# Altium PCB MiniPCIe.PcbDoc
Units mm, origin at the board's own origin, x right, y up, seen from the top; angles counter-clockwise.
Board outline 30 x 26.8 mm, 2 copper layers (Top Layer, Bottom Layer); 1 components, 0 nets, 54 pads, 0 vias.
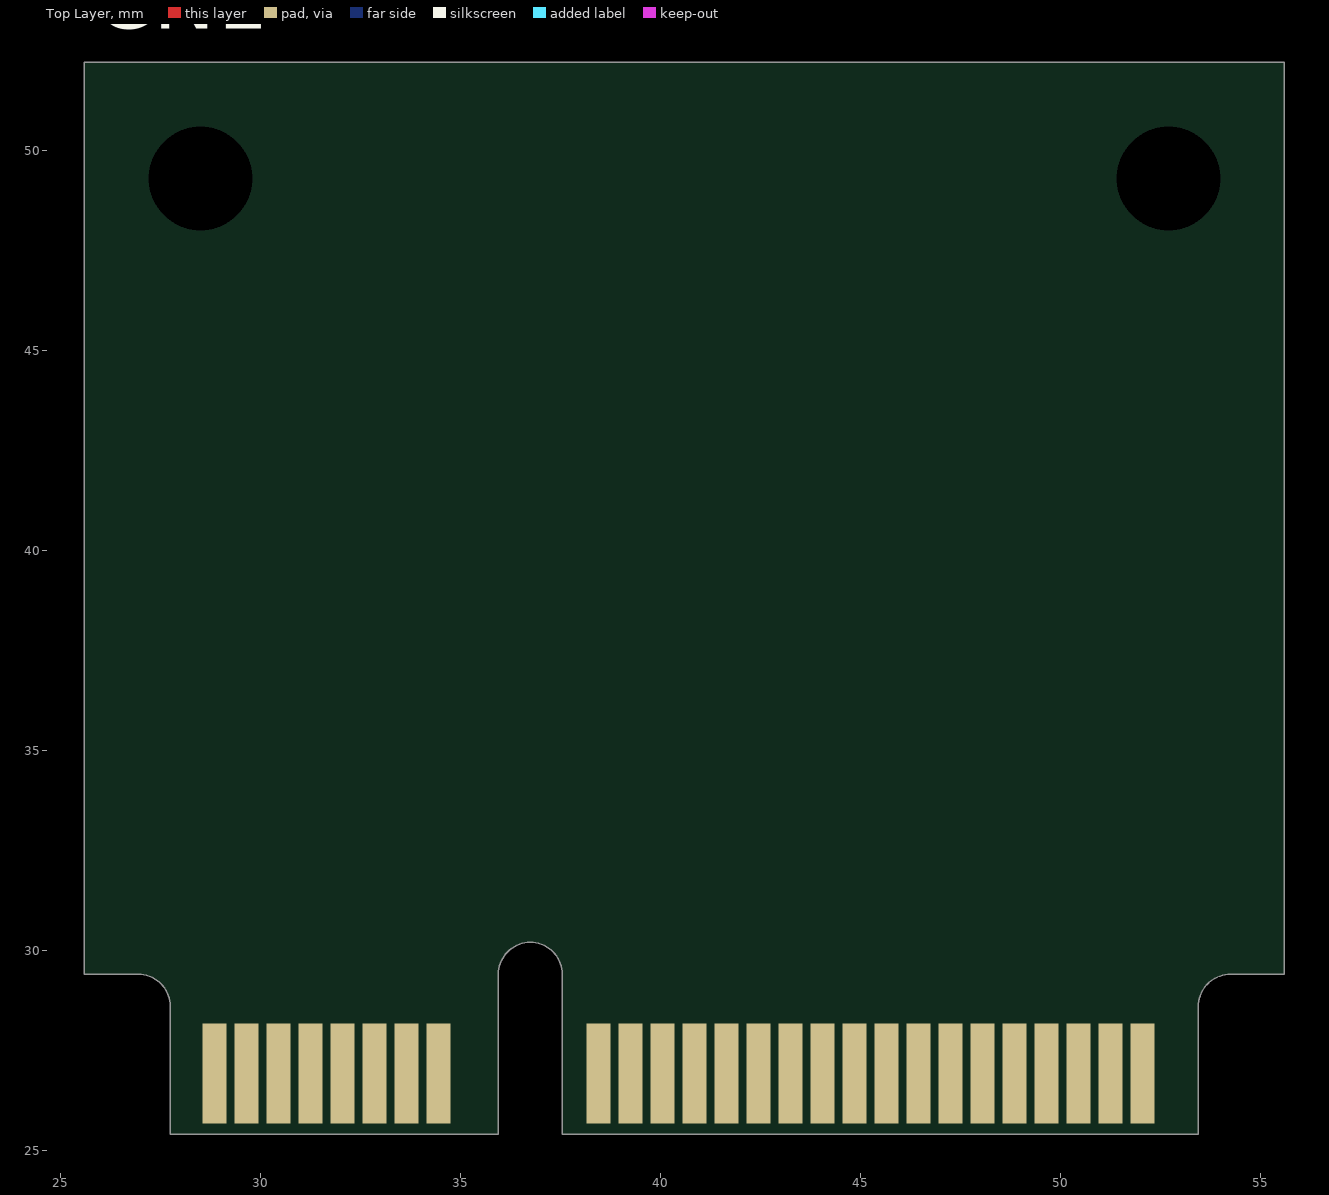
[diagram p0: Top Layer view]
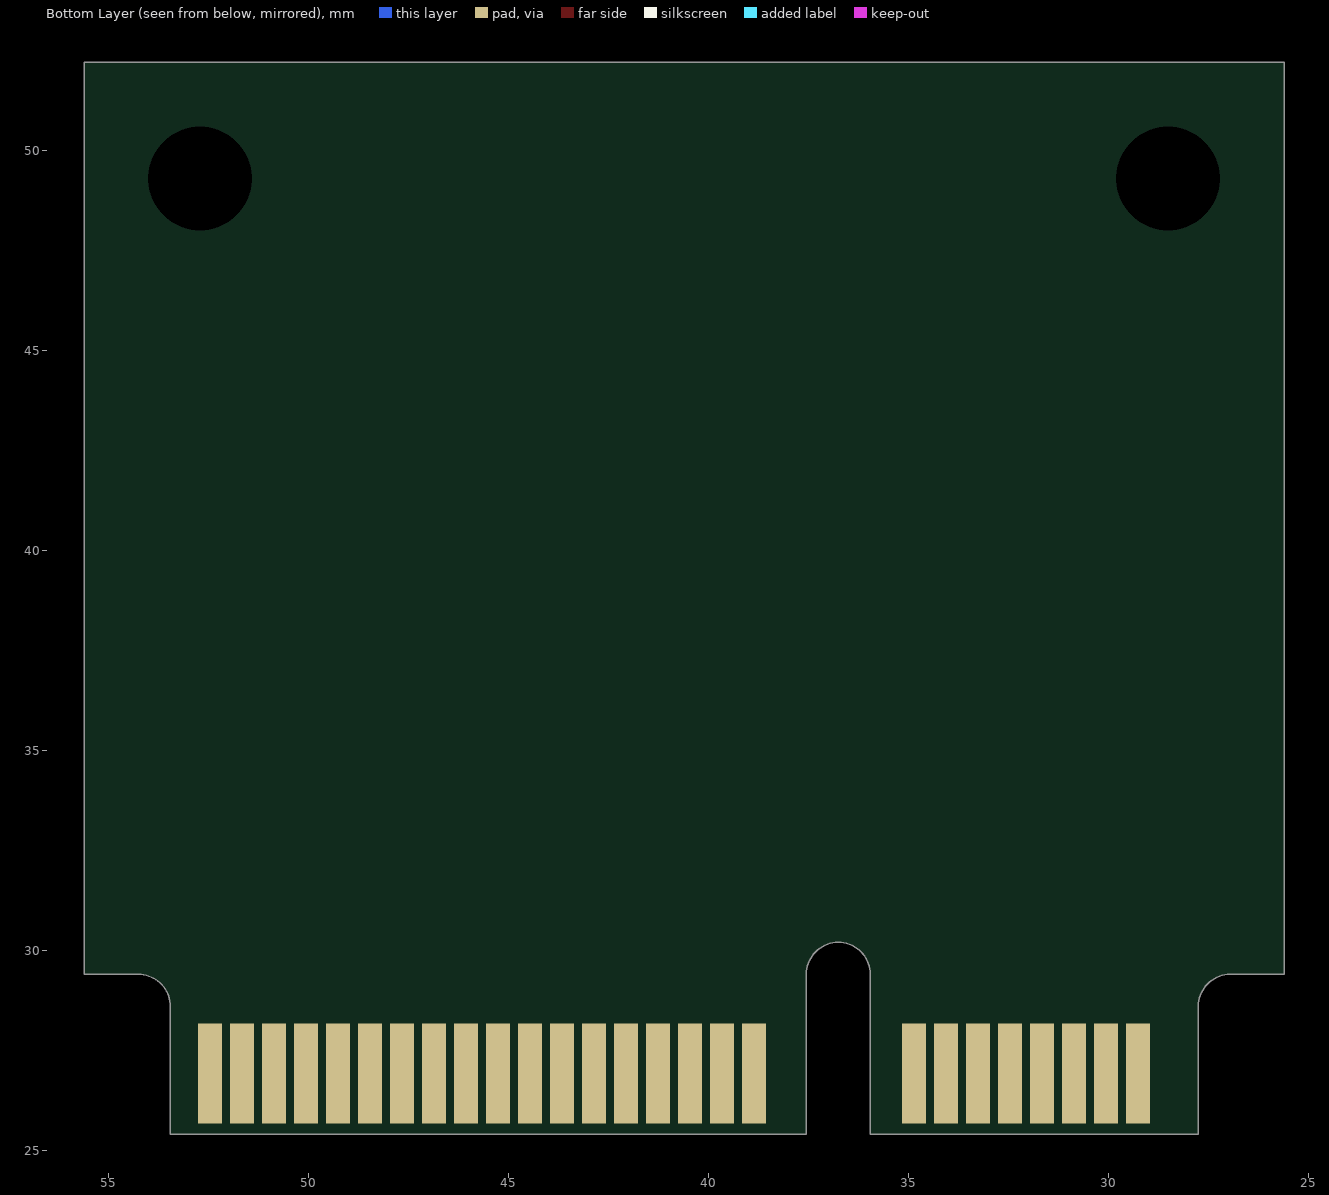
[diagram p1: Bottom Layer view, seen from below]

## Layer stack, top to bottom
Top Layer: signal copper 0.0356
Dielectric: dielectric 0.32, FR-4, Dk 4.8
Bottom Layer: signal copper 0.0356

## Board outline
27.746,28.6 ccw(c26.946,28.6) 26.946,29.4 25.596,29.4 25.596,52.2 55.596,52.2 55.596,29.4 54.246,29.4 ccw(c54.246,28.6) 53.446,28.6 53.446,25.4 37.546,25.4 37.546,29.4 ccw(c36.746,29.4) 35.946,29.4 35.946,25.4 27.746,25.4

## Design rules (kind name [scope] priority, off if disabled: settings)
Clearance [All] p1: gap=0.254
HoleSize [All] p1: absolutevalues=TRUE maxlimit=3 minlimit=0.025 maxpercent=80.000 minpercent=20.000
PolygonConnect [All] p1: connectstyle=Relief reliefconductorwidth=0.254 reliefentries=4 polygonreliefangle="90 Angle" airgapwidth=0.254
RoutingVias [All] p1: holewidth=0.711 width=1.27 viastyle="Through Hole" minholewidth=0.711 minwidth=1.27 maxholewidth=0.711 maxwidth=1.27
SolderMaskExpansion [All] p1: expansion=0.102
Width [All] p1: maxlimit=0.254 minlimit=0.254 preferedwidth=0.254
27 further rules are at their usual default settings.

## Components (designator, comment, footprint, x,y, rotation, side; value= is the part's Value field where it differs from the comment)
CN1 "Mini PCI Express Card Edge connector" "Mini PCI Express" 36.799,25.425 r0 top

## Footprints (in the part's own frame and the unit in brackets; to place one, negate y for a bottom-side part, rotate by r counter-clockwise, add the part's x,y. Pads: shape width x height; smd on the part's side, far side on the other; paste and mask are expansions set on the pad)
"Mini PCI Express" [mm]
  rect 0.6x2.5 smd: 1(-7.95,1.5) 3(-7.15,1.5) 5(-6.35,1.5) 7(-5.55,1.5) 9(-4.75,1.5) 11(-3.95,1.5) 13(-3.15,1.5) 15(-2.35,1.5) 17(1.65,1.5) 19(2.45,1.5) 21(3.25,1.5) 23(4.05,1.5) 25(4.85,1.5) 27(5.65,1.5) 29(6.45,1.5) 31(7.25,1.5) 33(8.05,1.5) 35(8.85,1.5) 37(9.65,1.5) 39(10.45,1.5) 41(11.25,1.5) 43(12.05,1.5) 45(12.85,1.5) 47(13.65,1.5) 49(14.45,1.5) 51(15.25,1.5)
  rect 0.6x2.5 smd far side: 2(-7.55,1.5) 4(-6.75,1.5) 6(-5.95,1.5) 8(-5.15,1.5) 10(-4.35,1.5) 12(-3.55,1.5) 14(-2.75,1.5) 16(-1.95,1.5) 18(2.05,1.5) 20(2.85,1.5) 22(3.65,1.5) 24(4.45,1.5) 26(5.25,1.5) 28(6.05,1.5) 30(6.85,1.5) 32(7.65,1.5) 34(8.45,1.5) 36(9.25,1.5) 38(10.05,1.5) 40(10.85,1.5) 42(11.65,1.5) 44(12.45,1.5) 46(13.25,1.5) 48(14.05,1.5) 50(14.85,1.5) 52(15.65,1.5)

## Part data
CN1: library part "MiniPCIe Card"

## Free pads (board coordinates)
  round 0 hole 2.6 unplated: 0(28.5,49.3) 1(52.7,49.3)

## Nets (pads, with @x,y where several pads share a name; then routed paths per layer and width w, separated by ;. In a path a pad name is that pad's centre, name@x,y a point inside that pad or via, vN(x,y) a via of type N, cw(c..) or ccw(c..) an arc to the next point about the centre after c; other vN are vias at no path point)
pads on no net: CN1.1 CN1.2 CN1.3 CN1.4 CN1.5 CN1.6 CN1.7 CN1.8 CN1.9 CN1.10 CN1.11 CN1.12 CN1.13 CN1.14 CN1.15 CN1.16 CN1.17 CN1.18 CN1.19 CN1.20 CN1.21 CN1.22 CN1.23 CN1.24 CN1.25 CN1.26 CN1.27 CN1.28 CN1.29 CN1.30 CN1.31 CN1.32 CN1.33 CN1.34 CN1.35 CN1.36 CN1.37 CN1.38 CN1.39 CN1.40 CN1.41 CN1.42 CN1.43 CN1.44 CN1.45 CN1.46 CN1.47 CN1.48 CN1.49 CN1.50 CN1.51 CN1.52

## Silkscreen, mask and mechanical layers (free items; w line width, h text height)
Mechanical 1:
  circle w0.1: c28.496,49.3 r1.3
  circle w0.1: c52.696,49.3 r1.3
  lines w0.1: 25.596,29.4 25.596,52.2 55.596,52.2 55.596,29.4 54.246,29.4 ccw(c54.246,28.6) 53.446,28.6 53.446,25.4 37.546,25.4 37.546,29.4 ccw(c36.746,29.4) 35.946,29.4 35.946,25.4 27.746,25.4 27.746,28.6 ccw(c26.946,28.6) 26.946,29.4 25.596,29.4